# Altium PCB 舵机-modifi.PcbDoc
Units mm, origin at the board's own origin, x right, y up, seen from the top; angles counter-clockwise.
Board outline 31.5 x 23 mm, 2 copper layers (Top Layer, Bottom Layer); 15 components, 11 nets, 64 pads, 24 vias.
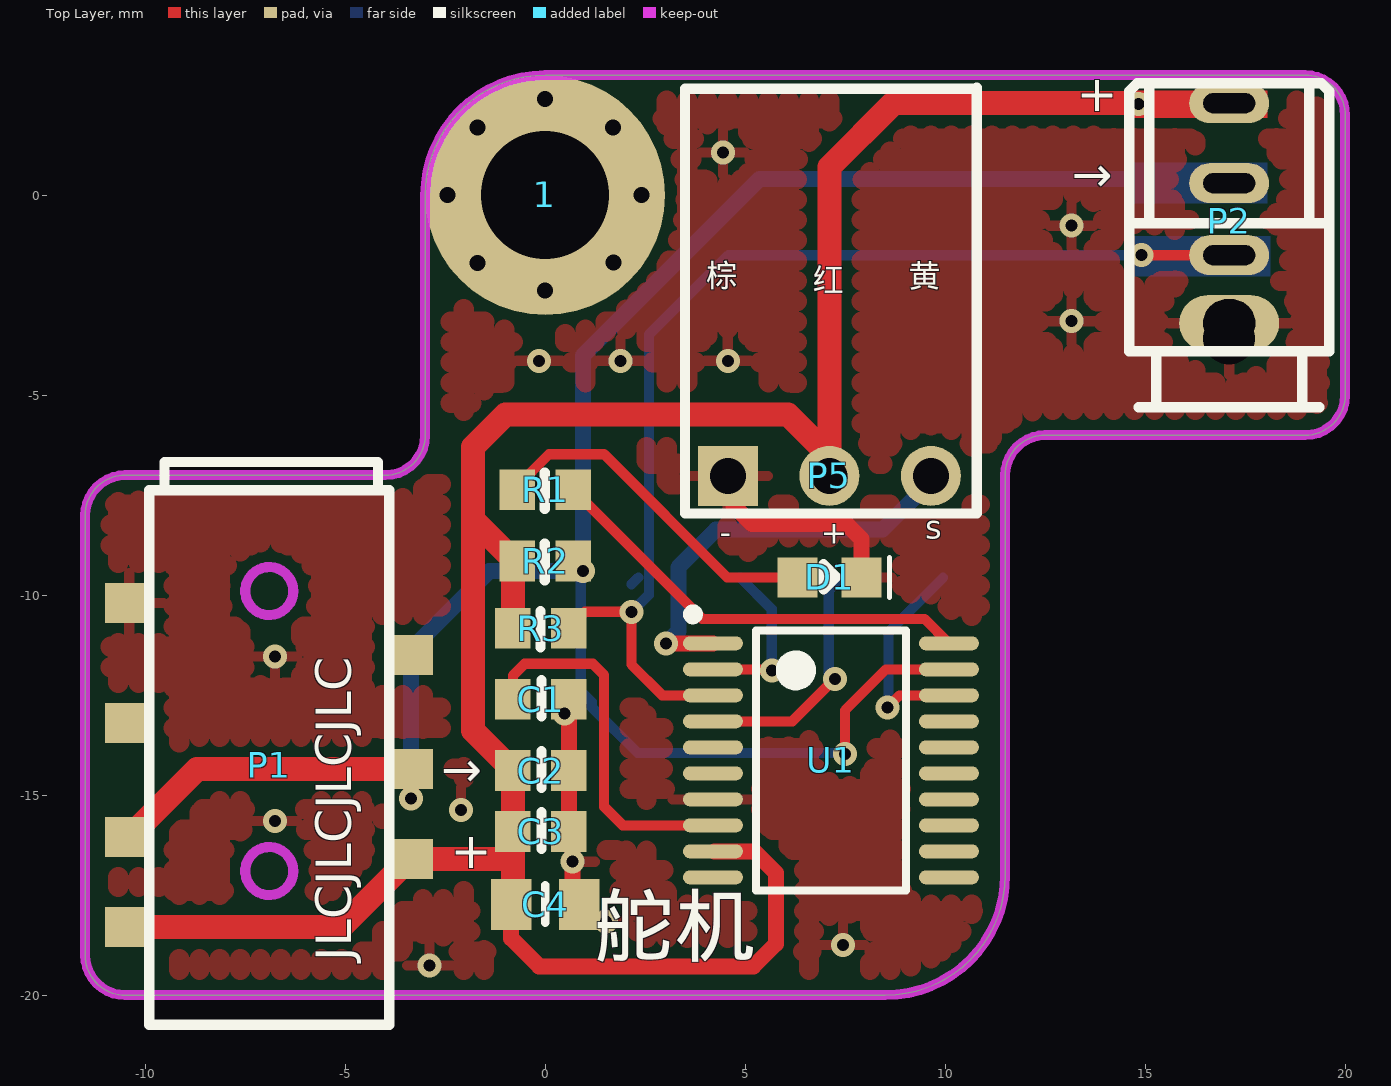
[diagram p0: Top Layer view]
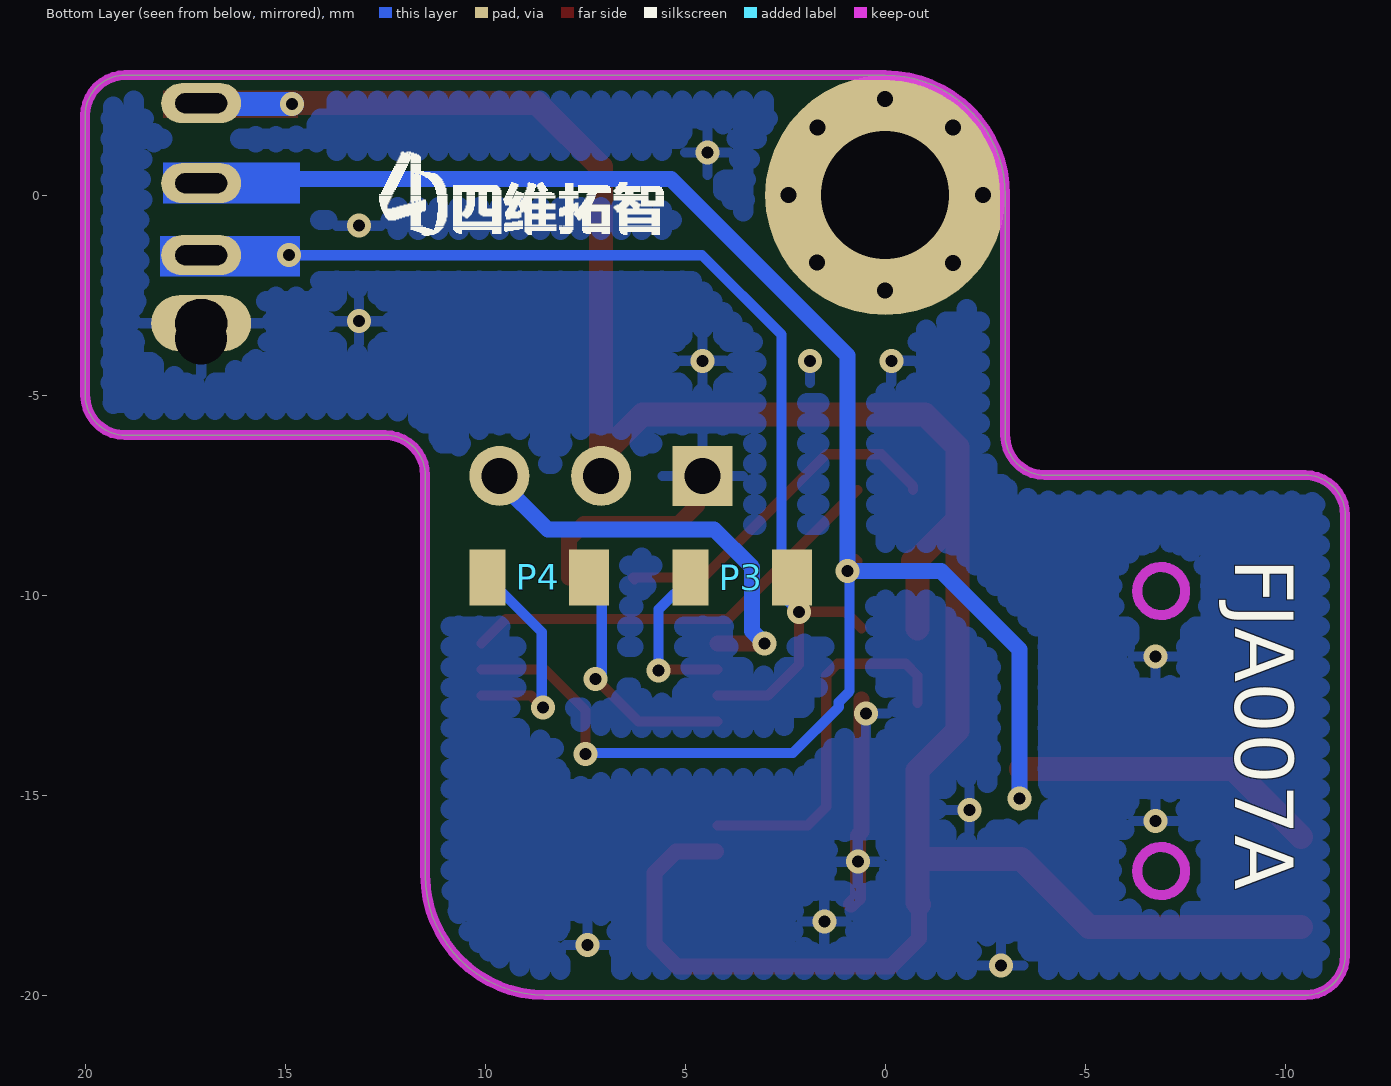
[diagram p1: Bottom Layer view, seen from below]
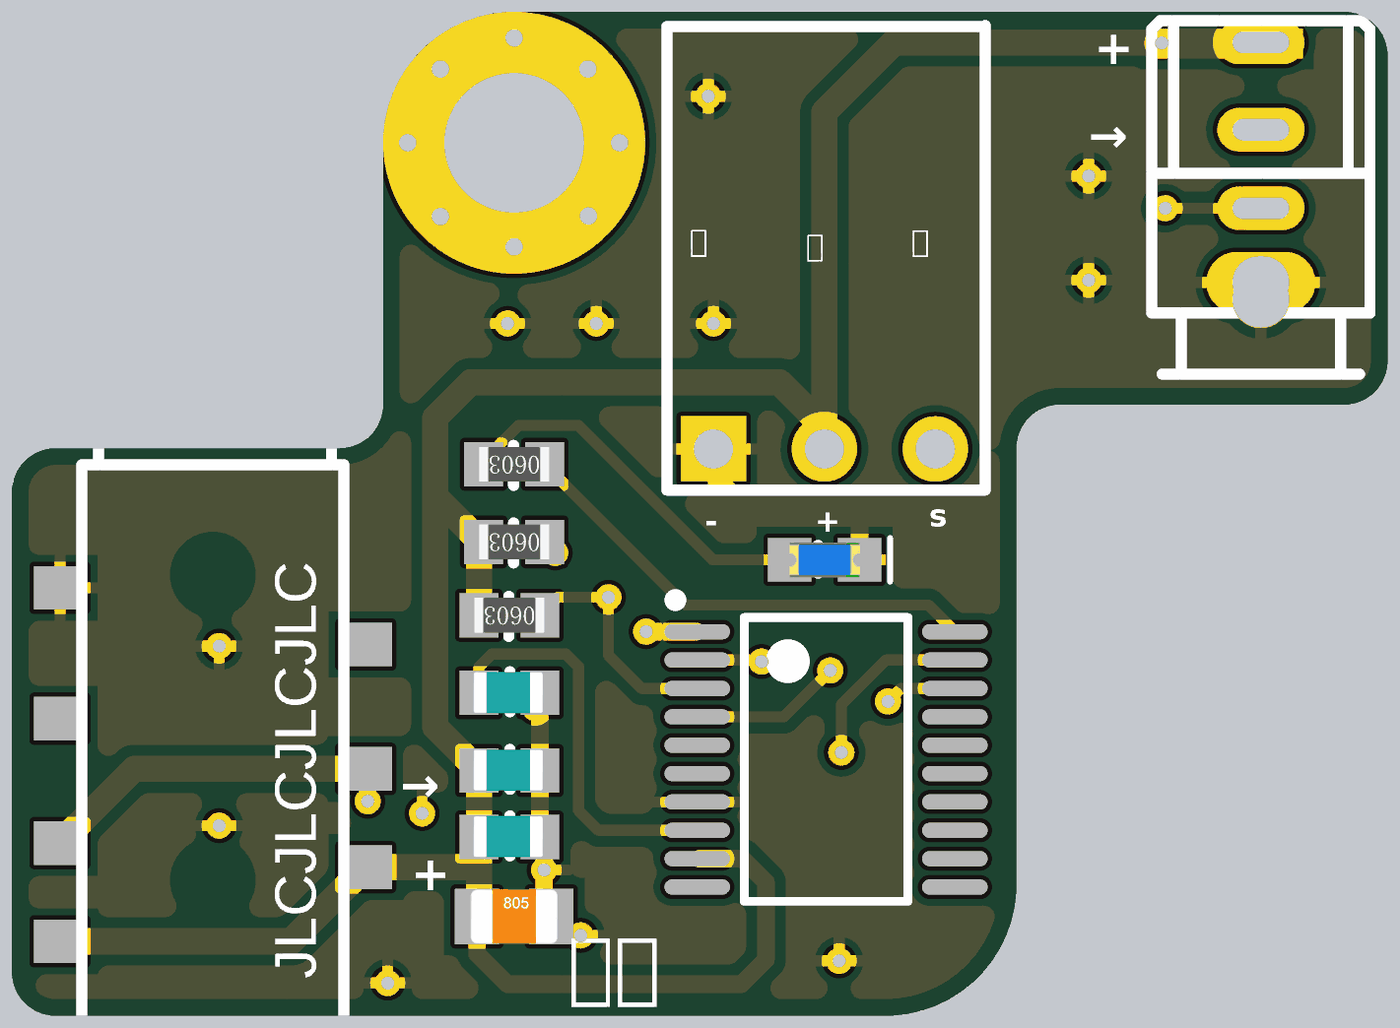
[diagram p2: 3D render of the assembled board from above, using the file's embedded part models]

## Layer stack, top to bottom
Top Layer: signal copper 0.0356
Dielectric: dielectric 0.32, FR-4, Dk 4.8
Bottom Layer: signal copper 0.0356

## Board outline
-11.5,-19 ccw(c-10.5,-19) -10.5,-20 8.5,-20 ccw(c8.5,-17) 11.5,-17 11.5,-7 cw(c12.5,-7) 12.5,-6 19,-6 ccw(c19,-5) 20,-5 20,2 ccw(c19,2) 19,3 0,3 ccw(c0,0) -3,0 -3,-6 cw(c-4,-6) -4,-7 -10.5,-7 ccw(c-10.5,-8) -11.5,-8

## Design rules (kind name [scope] priority, off if disabled: settings)
Clearance [All] p1: gap=0.254
PolygonConnect [All] p1: connectstyle=Relief reliefconductorwidth=0.254 reliefentries=4 polygonreliefangle="90 Angle"
RoutingVias [All] p1: holewidth=0.711 width=1.27 viastyle="Through Hole" minholewidth=0.711 minwidth=1.27 maxholewidth=0.711 maxwidth=1.27
SilkToSilkClearance [All] p1 off: silktosilkclearance=0.254
SilkscreenOverComponentPads [All] p1 off: minsilkscreentomaskgap=0.254
SolderMaskExpansion [All] p1: expansion=0.102
TestPointUsage [All] p1: valid=0 allowmultiple=FALSE
Testpoint [All] p1: side=15 testpointundercomponent=TRUE minsize=1.016 maxsize=2.54 preferedsize=1.524 minholesize=0 maxholesize=1.016 preferedholesize=0.813 testpointgrid=0.025 style=1023 order=0-112345678
Width [All] p1: maxlimit=0.6 minlimit=0.254 preferedwidth=0.254
22 further rules are at their usual default settings.

## Components (designator, comment, footprint, x,y, rotation, side; value= is the part's Value field where it differs from the comment)
1 "M4固定孔" M4固定孔 0,0 r90 top
C1 "1uF" 0603C -0.109,-12.604 r0 top
C2 "100nF" 0603C -0.109,-14.382 r0 top
C3 "10uF" 0603C -0.109,-15.906 r0 top
C4 "47uF" 0805C 0,-17.729 r0 top
D1 "LED" 0603D 7.109,-9.556 r0 top
P1 "4段3.5插座" 4段3.5耳机贴片座 -6.9,-13.596 r180 top
P2 "4段3.5插头" 4段3.5插头 17.1,0.3 r270 top
P3 "测试点" 2SMT-2.54 3.598,-9.556 r180 bottom
P4 "测试点2" 2SMT-2.54 8.678,-9.556 r180 bottom
P5 "Header 3" 3pin弯脚 7.104,-7.016 r0 top
R1 "1K" 0603R 0,-7.366 r180 top
R2 "100K" 0603R 0,-9.144 r180 top
R3 "10K" 0603R -0.109,-10.826 r180 top
U1 "STM8S003" TSSOP20 7.142,-14.128 r0 top

## Footprints (in the part's own frame and the unit in brackets; to place one, negate y for a bottom-side part, rotate by r counter-clockwise, add the part's x,y. Pads: shape width x height; smd on the part's side, far side on the other; paste and mask are expansions set on the pad)
2SMT-2.54 [mm]
  rect 0.9x1.4 smd: 1(-1.27,0)
  rect 1x1.4 smd: 2(1.27,0)
3pin弯脚 [mm]
  rect 1.5x1.5 hole 0.9: 1(-2.54,0)
  round 1.5 hole 0.9: 2(0,0) 3(2.54,0)
  silkscreen extent -3.61,-0.94 3.68,9.7, body extent -3.64,-0.28 3.58,9.73, height 2.5
4段3.5插头 [mm]
  oval 1.4x2.5 hole 1.2 slot 1.3 at 90 deg: 1(3.5,0)
  round 1 hole 1.3: 1(3.886,0)
  oval 1x2 hole 0.5 slot 1.3 at 90 deg: 2(1.8,0) 3(0,0) 4(-2,0)
  silkscreen extent -2.5,-2.5 5.6,2.5, body extent -3.33,-2.54 20.32,2.46, height 5
4段3.5耳机贴片座 [mm]
  rect 1.2x1 smd: 1(3.5,-3.4) 2(-3.5,-2.1) 2(3.5,-0.4) 3(-3.5,0.75) 3(3.5,2.45) 4(-3.5,3) 4(3.5,4.7)
  Keep-Out Layer circle w0.254: c0,3.3 r0.6
  Keep-Out Layer circle w0.254: c0,-3.7 r0.6
  silkscreen extent -3,-6.93 3,7.14, body extent -3.75,-7.38 3.86,7.12, height 5.49
0603C [mil] "Chip Capacitor, 2-Leads, Body 1.0x0.5mm, IPC Medium Density"
  rect 35x40 smd: 1(-27.5,0) 2(27.5,0)
  silkscreen extent 0,-17 0,19, body extent -32,-18 30,19, height 31
0603D [mm]
  rect 1x1 smd: 1(-0.8,0) 2(0.8,0)
  silkscreen extent -0.15,-0.5 1.5,0.5, body extent -0.81,-0.4 0.81,0.4, height 0.6
0603R [mil]
  rect 35x40 smd: 1(-27.5,0) 2(27.5,0)
  silkscreen extent 0,-17 1,19, body extent -31,-16 32,16, height 18
0805C [mm]
  rect 1.016x1.27 smd: 1(-0.85,0) 2(0.85,0)
  silkscreen extent 0,-0.46 0,0.48, body extent -1,-0.63 1,0.63, height 0.77
M4固定孔 [mm]
  round 0.8 hole 0.4: 0(0,2.438) 1(1.689,1.689) 2(2.4,0) 3(1.689,-1.689) 4(0,-2.413) 5(-1.676,-1.702) 6(-2.388,0) 7(-1.689,1.689)
  round 6 hole 3.2: 0(0,0)
TSSOP20 [mm]
  oval 1.5x0.35 smd: 1(-2.95,2.925) 2(-2.95,2.275) 3(-2.95,1.625) 4(-2.95,0.975) 5(-2.95,0.325) 6(-2.95,-0.325) 7(-2.95,-0.975) 8(-2.95,-1.625) 9(-2.95,-2.275) 10(-2.95,-2.925) 11(2.95,-2.925) 12(2.95,-2.275) 13(2.95,-1.625) 14(2.95,-0.975) 15(2.95,-0.325) 16(2.95,0.325) 17(2.95,0.975) 18(2.95,1.625) 19(2.95,2.275) 20(2.95,2.925)
  silkscreen extent -3.57,-3.25 1.88,3.77, body extent -3.15,-3.25 3.1,3.25, height 2

## Part data
C1 C2 C3: library part Cap, "Capacitor"
C4: library part Cap2, "Capacitor"
D1: library part LED0, "Typical INFRARED GaAs LED"
P3 P4: library part "Header 2", "Header, 2-Pin"
P5: "Header, 3-Pin"
R1 R2 R3: library part Res1, "Resistor"

## Via types
v1: diameter 0.6, hole 0.3, Top Layer to Bottom Layer, 24 vias

## Nets (pads, with @x,y where several pads share a name; then routed paths per layer and width w, separated by ;. In a path a pad name is that pad's centre, name@x,y a point inside that pad or via, vN(x,y) a via of type N, cw(c..) or ccw(c..) an arc to the next point about the centre after c; other vN are vias at no path point)
GND: C1.2 C2.2 C3.2 C4.2 D1.2 P1.1 P2.1 P5.1 U1.7 | length 10.5
  Top Layer w0.4: C1.2 C2.2 C3.2 0.686,-16.003 0.686,-17.565 C4.2 ; P5.1 4.71,-7.162 4.71,-7.758 5.172,-8.22 7.239,-8.22 7.534,-8.22 7.909,-8.595 D1.2
  other v1: -2.896,-19.253 7.442,-18.745 1.524,-18.161 0.686,-16.662 -6.756,-15.646 -2.108,-15.367 0.483,-12.954 -6.756,-11.532 -0.152,-4.14 1.88,-4.14 4.564,-4.14 13.157,-3.15 13.157,-0.762 4.445,1.067
IN: P1.3 P2.3 R2.1 U1.19 | length 53.6
  Top Layer w0.254: R2.1 0.749,-9.093 0.965,-9.093 1.016,-9.144 1.016,-9.322 v1(0.94,-9.398) ; v1(7.493,-13.97) 7.493,-12.878 8.518,-11.853 U1.19
  Top Layer w0.4: P1.3@-3.4,-14.346 -3.353,-14.393 v1(-3.353,-15.088)
  Top Layer w0.6: P1.3@-10.4,-16.046 -8.7,-14.346 P1.3@-3.4,-14.346
  Bottom Layer w0.254: v1@0.889,-9.398 0.889,-12.397 1.164,-12.672 1.164,-12.797 2.311,-13.945 7.468,-13.945 v1(7.493,-13.97)
  Bottom Layer w0.4: v1(-3.353,-15.088) -3.353,-11.354 -1.397,-9.398 v1@0.889,-9.398 ; v1(0.94,-9.398) 0.94,-4.013 5.359,0.406 14.803,0.406 14.91,0.3
NetC1_1: C1.1 U1.8 | length 9.4
  Top Layer w0.254: C1.1@-0.808,-12.698 C1.1 -0.808,-12.009 -0.514,-11.715 1.191,-11.715 1.473,-11.997 1.473,-15.291 1.935,-15.753 U1.8
NetD1_1: D1.1 R1.2 | length 8.8
  Top Layer w0.254: R1.2 -0.699,-7.272 0.096,-6.477 1.473,-6.477 4.552,-9.556 D1.1 D1.1@6.264,-9.601
NetR1_1: R1.1 U1.20 | length 11
  Top Layer w0.254: R1.1 3.924,-10.592 9.481,-10.592 U1.20
NRST: P4.2 U1.4 | length 6.3
  Top Layer w0.254: U1.4 6.176,-13.153 v1(7.239,-12.09) v1@7.264,-12.116
  Bottom Layer w0.254: v1(7.239,-12.09) 7.087,-11.938 7.087,-9.878 P4.2
OUT: P5.3 U1.1 | length 10.5
  Top Layer w0.4: v1(3.023,-11.201) 4.191,-11.201 U1.1
  Bottom Layer w0.4: v1(3.023,-11.201) 3.327,-10.897 3.327,-9.305 4.276,-8.357 8.433,-8.357 9.644,-7.145 P5.3
RX: P2.2 P3.2 R3.1 U1.3 | length 28.5
  Top Layer w0.254: R3.1@0.874,-10.541 R3.1 1.001,-10.414 v1(2.159,-10.414) 2.159,-11.735 2.927,-12.503 U1.3 ; v1(14.91,-1.5) P2.2
  Bottom Layer w0.254: v1(2.159,-10.414) 2.164,-10.414 2.591,-9.987 2.591,-3.488 4.579,-1.5 v1(14.91,-1.5) ; P3.2@2.159,-9.725 P3.2
SWIM: P4.1 U1.18 | length 5.5
  Top Layer w0.254: v1(8.56,-12.802) 8.858,-12.503 U1.18
  Bottom Layer w0.254: v1@8.458,-12.802 8.585,-12.675 8.585,-10.919 P4.1
TX: P3.1 U1.2 | length 4.1
  Top Layer w0.254: U1.2 5.63,-11.853 v1(5.664,-11.887)
  Bottom Layer w0.254: P3.1 5.664,-10.352 v1(5.664,-11.887)
VCC: C2.1 C3.1 C4.1 P1.4 P2.4 P5.2 R2.2 R3.2 U1.9 | length 65.5
  Top Layer w0.4: C4.1 -0.85,-18.581 -0.152,-19.279 5.207,-19.279 5.766,-18.72 5.766,-16.942 5.227,-16.403 U1.9@4.236,-16.403
  Top Layer w0.6: P1.4@-10.4,-18.296 -5.1,-18.296 -3.4,-16.596 -0.808,-16.596 ; C4.1 -0.808,-17.687 -0.808,-16.596 ; R3.2 R2.2@-0.808,-9.144 ; R2.2 -0.766,-9.144 -1.806,-8.103 ; v1@14.834,2.3 8.701,2.3 7.104,0.703 P5.2 7.104,-6.52 6.071,-5.486 -0.994,-5.486 -1.806,-6.299 -1.806,-8.103 ; -1.806,-8.103 -1.806,-13.384 C2.1 C3.1 -0.808,-16.596
  Bottom Layer w0.6: v1(14.834,2.286) 17.086,2.286 P2.4
pads on no net: 1.0 1.1 1.2 1.3 1.4 1.5 1.6 1.7 P1.2 U1.5 U1.6 U1.10 U1.11 U1.12 U1.13 U1.14 U1.15 U1.16 U1.17

## Polygon pours and split planes (outlines as drawn)
GND on Top Layer "Bottom Layer-No Net" (hatched 90Degree grid 0.508 track 0.508, remove dead copper, pour order 1000): -15.062,5.08 -14.935,4.953 21.133,4.953 21.133,-23.368 21.006,-23.495 20.091,-22.581 -15.469,-22.581 -15.469,4.42 -14.453,5.436
GND on Bottom Layer "Bottom Layer-No Net" (hatched 90Degree grid 0.508 track 0.508, remove dead copper, pour order 1001): -16.383,5.029 22.682,5.029 23.063,4.648 22.123,3.708 22.123,-24.46 -17.399,-24.46 -17.424,-24.435 -16.612,-23.622 -16.612,5.029

## Keep-outs
Keep-Out Layer:
  the board outline again, w0.25

## Other copper
Top Layer:
  rectangle net VCC: 14.681,1.93 18.059,2.616
Bottom Layer:
  rectangle net RX: 14.63,-2.032 18.136,-1.016
  rectangle net IN: 14.63,-0.203 18.059,0.813

## Silkscreen, mask and mechanical layers (free items; w line width, h text height)
Top Overlay:
  text "+" at 13.284,1.803 h1.52
  text "→" at 13.157,-0.208 h1.52
  text "棕" at 4.013,-2.489 h1
  text "黄" at 9.093,-2.495 h1
  text "红" at 6.68,-2.598 h1
  text "s" at 9.5,-8.788 h1
  text "-" at 4.369,-8.915 h1
  text "+" at 6.883,-8.915 h1
  text "→" at -2.602,-15.086 h1.52
  text "+" at -2.362,-17.12 h1.52
  text "JLCJLCJLCJLC" at -4.547,-19.147 h1.52 r90
  text "舵机" at 1.219,-19.482 h2.54
Bottom Overlay:
  drawing of 640 lines, arcs and shapes, not listed
  text "FJA007A" at -8.263,-9.078 h2.5 r90